# EAGLE board esp12_led (EAGLE 7.2.0)
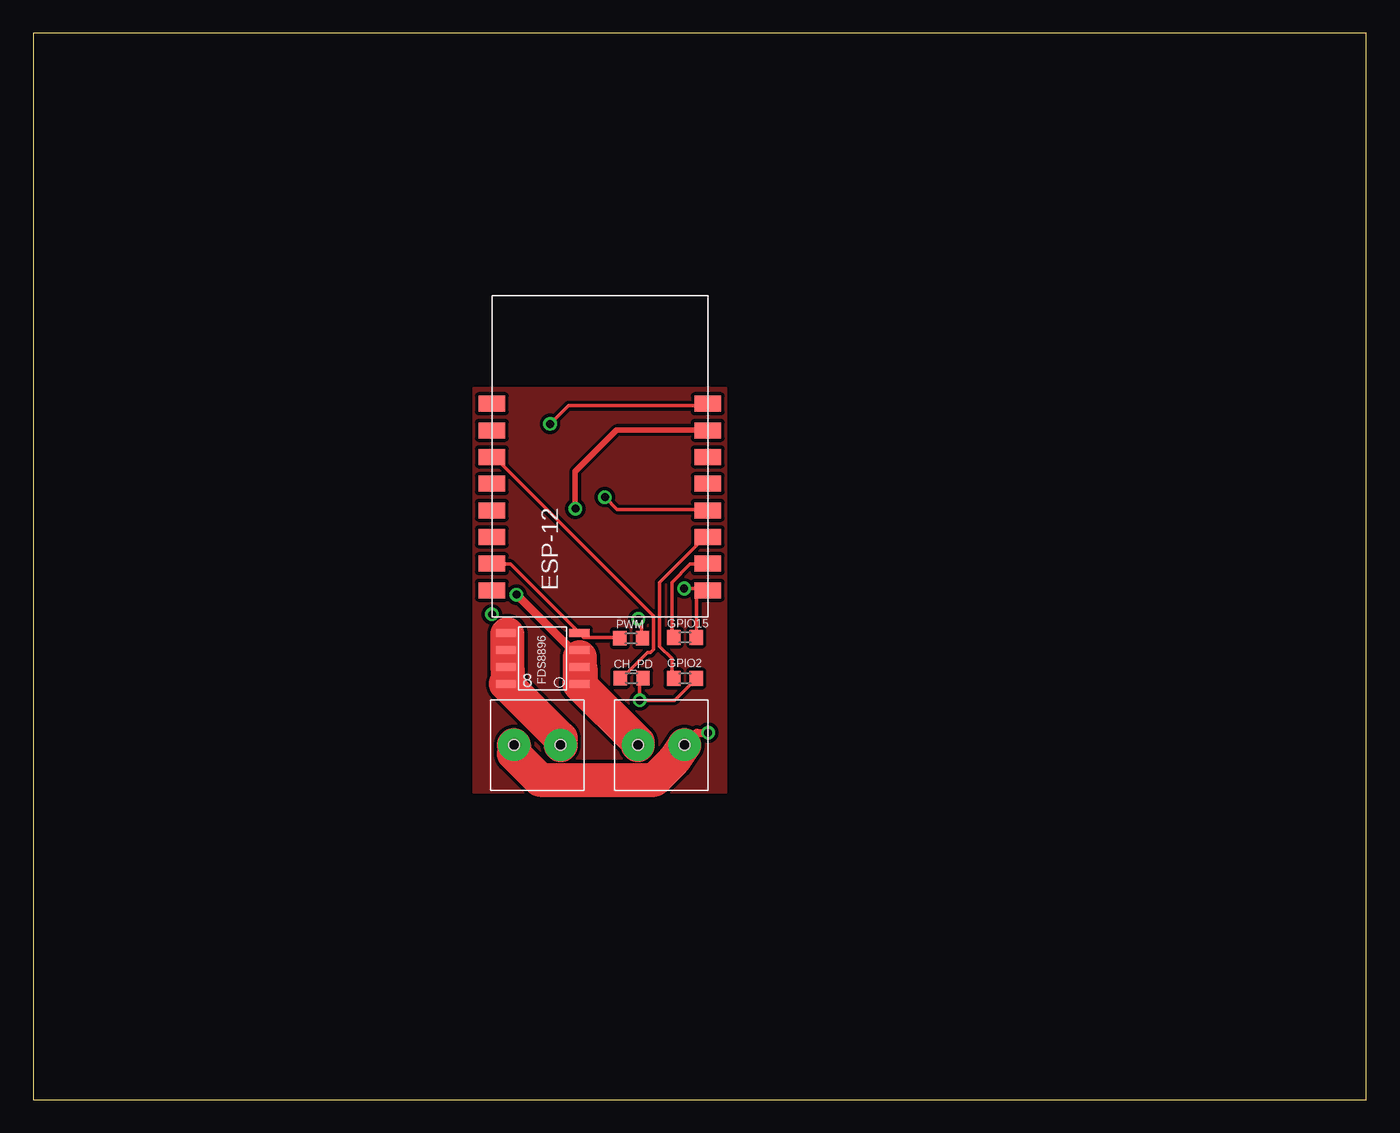
[diagram p0: board, top side]
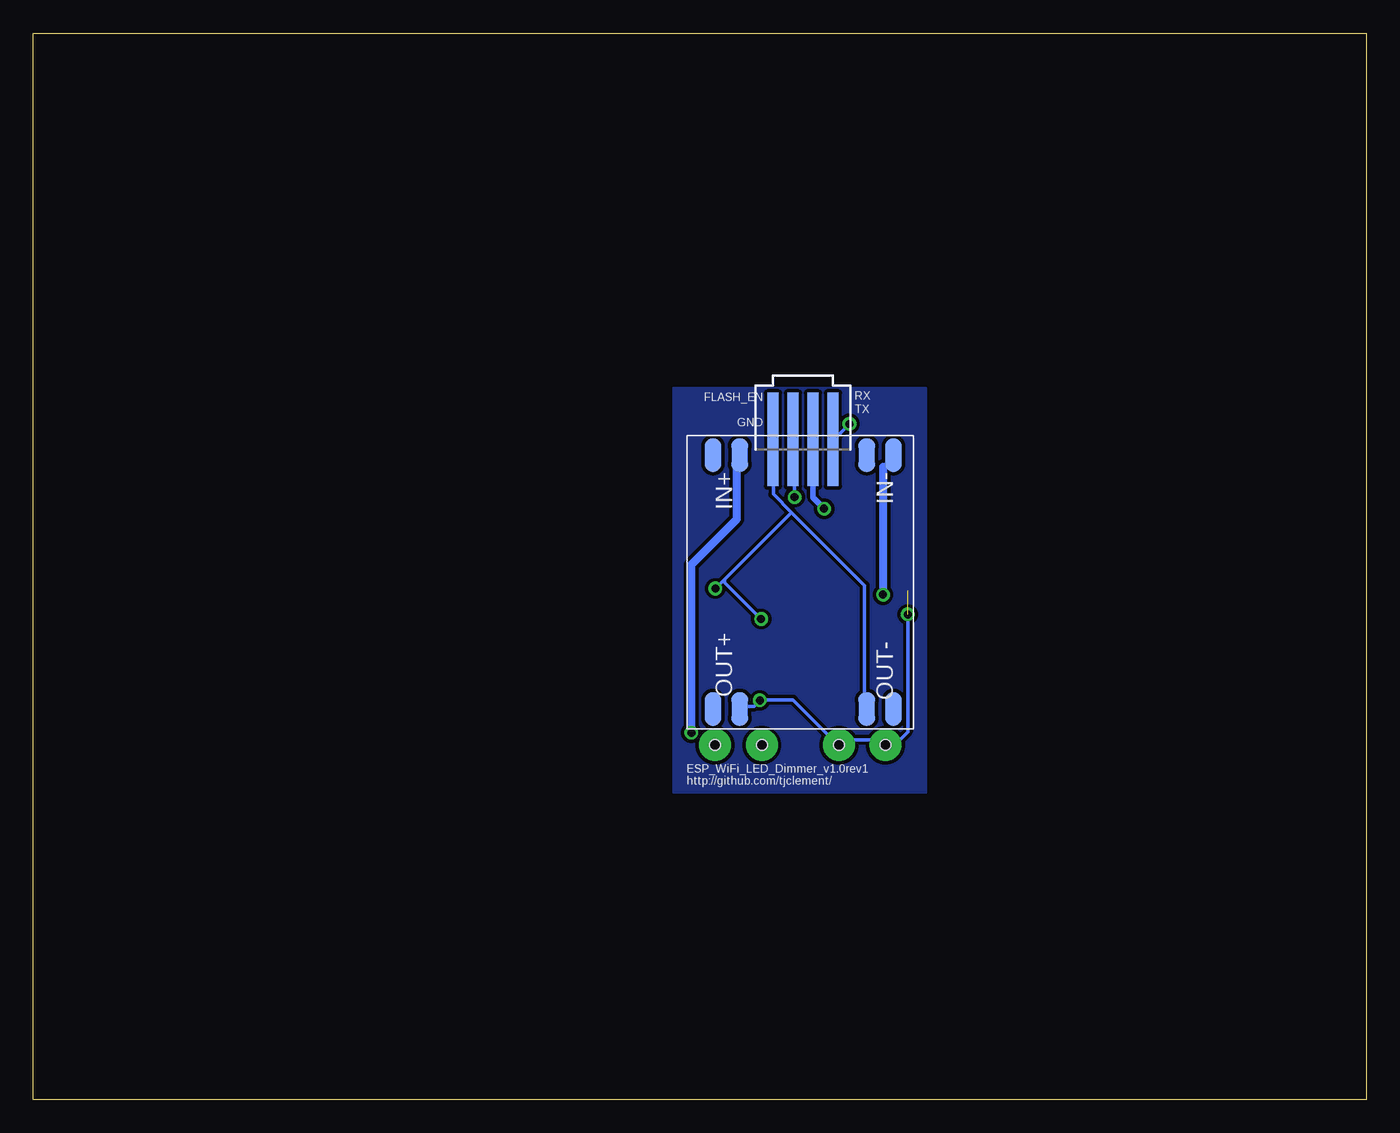
[diagram p1: board, bottom side, seen from below]

Size 100 x 80 mm. Coordinates in mm from the lower left corner, seen from the top.
Outline: 0,0 100,0 100,80 0,80 0,0
Copper layers (1*16): Top 0.035mm / dielectric 1.5mm / Bottom 0.035mm
Design rules "default": minimum track width 10mil, minimum drill 24mil, track to track 8mil, track to pad 8mil, pad to pad 8mil, via to via 8mil, smd to smd 8mil, copper to edge 40mil, drill to drill 8mil, minimum pad ring 10mil, minimum via ring 8mil, stop-mask expansion 4mil, vias tented up to drill 0mil, thermal gap 10mil

## Footprints (pad centres in the part's own frame; a part is rotated, then mirrored left to right if it is on the bottom)
KF350-2P = drill 0.8 pad 2.4: 1 -1.75,0; 2 1.75,0 | hole 0.8: -1.75,0; 1.75,0
R0603 = smd 1 x 1.1: 1 -0.85,0; 2 0.85,0
CN1594 = smd 2.54 x 1.27: IN+(1) -9.525,-4.547; IN+(2) -9.525,-6.553; IN-(1) -9.525,6.985; IN-(2) -9.525,4.978; OUT+(1) 9.525,-4.547; OUT+(2) 9.525,-6.553; OUT-(1) 9.525,6.985; OUT-(2) 9.525,4.978
ESP8266-ESP12 = smd 2 x 1.2: 1 16.2,2; 2 16.2,4; 3 16.2,6; 4 16.2,8; 5 16.2,10; 6 16.2,12; 7 16.2,14; 8 16.2,16; 9 0,16; 10 0,14; 11 0,12; 12 0,10; 13 0,8; 14 0,6; 15 0,4; 16 0,2
SO-8 = smd 1.524 x 0.61: 1 -2.743,1.905; 2 -2.743,0.635; 3 -2.743,-0.635; 4 -2.743,-1.905; 5 2.743,-1.905; 6 2.743,-0.635; 7 2.743,0.635; 8 2.743,1.905
87438-04 = smd 7 x 0.85: 1 0,2.25; 2 0,0.75; 3 0,-0.75; 4 0,-2.25

## Placement (x,y rotation side)
12V_IN  KF350-P2  [KF350-2P]  47.1,26.59 0 top
CH_PD  10k  [R0603]  44.89,31.62 0 top
DC_CONVERTER  CN1594THROUGH-HOLE  [CN1594]  42.45,38.83 270 bottom
ESP-12  ESP8266_ESP-12  [ESP8266-ESP12]  34.4,36.21 0 top
FDS8896  [SO-8]  38.21,33.1 180 top
GPIO2  10k  [R0603]  48.89,31.59 0 top
GPIO15  10k  [R0603]  48.89,34.67 0 top
LED  KF350-P2  [KF350-2P]  37.81,26.59 0 top
PROG  [87438-04]  42.26,49.53 270 bottom  (not fitted)
PWM  10k  [R0603]  44.85,34.61 0 top

## Library data of the parts
12V_IN LED = KF350-P2
CH_PD GPIO2 GPIO15 PWM = rcl
DC_CONVERTER = CN1594_smd
ESP-12 = ESP8266-ESP12
FDS8896 = transistor-fet
PROG = con-molex; OC_FARNELL: unknown; OC_NEWARK: unknown

## Nets
N$1: CH_PD.2 DC_CONVERTER.OUT+(1) ESP-12.16 GPIO2.2
N$2: CH_PD.1 ESP-12.11
N$3: ESP-12.3 GPIO2.1
N$4: FDS8896.5 FDS8896.6 FDS8896.7 FDS8896.8 LED.2
N$5: ESP-12.8 PROG.1
N$6: DC_CONVERTER.OUT-(2) ESP-12.1 GPIO15.2 PROG.4 PWM.2
N$7: ESP-12.2 GPIO15.1
N$8: ESP-12.7 PROG.2
N$9: ESP-12.4 PROG.3
N$10: DC_CONVERTER.IN-(1) FDS8896.3
N$12: 12V_IN.2 DC_CONVERTER.IN+(1) LED.1
S$2: ESP-12.15 FDS8896.4 PWM.1
S$3: 12V_IN.1 FDS8896.1 FDS8896.2

## Tracks (layer width: path | path; a pad name or v marks a point on that pad's centre or on a via)
N$1  (via drill 0.6, 0.61)  (1 unrouted)
  Top 0.254: CH_PD.2 45.72,31.55 45.49,31.32 v45.49,29.95 48.09,29.95 GPIO2.2
  Bottom 0.254: DC_CONVERTER.OUT+(1) 46.86,29.49 45.95,29.49 v45.49,29.95 45.44,30 43,30 40,27 35,27 34.4,27.6 v34.4,36.4
N$2
  Top 0.254: CH_PD.1 44.26,31.71 46.08,33.54 46.31,33.54 46.54,33.77 46.54,36.29 34.42,48.4 ESP-12.11
N$3
  Top 0.254: GPIO2.1 47.91,31.71 47.91,33.09 47,34 47,38.8 50.43,42.23 ESP-12.3
N$4
  Top 0.254: 35.57,31.26 FDS8896.8 | 35.57,32.4 FDS8896.7 35.57,32.63 | 35.57,33.54 FDS8896.6 35.57,33.77 | 35.57,34.91 FDS8896.5
  Top 2.54: 35.57,32.4 35.57,31.26 | 35.57,32.63 35.57,33.54 | 35.57,33.77 35.57,34.91 | LED.2 39.56,27.1 FDS8896.8
N$5  (via drill 0.61)
  Top 0.254: v38.77,50.69 40.14,52.06 50.43,52.06 ESP-12.8
  Bottom 0.254: v38.77,50.69 39.91,49.55 PROG.1
N$6  (via drill 0.61)
  Top 0.254: v48.83,38.34 49.74,38.34 | 49.74,38.34 50.43,38.34 ESP-12.1 49.74,38.34 | 49.74,38.34 49.74,34.69 GPIO15.2 | v45.4,36.06 45.63,35.83 45.63,34.69 PWM.2
  Bottom 0.254: 43.11,44.06 44.48,45.43 44.48,49.32 PROG.4 | 43.11,44.06 37.63,38.57 37.63,29.43 DC_CONVERTER.OUT-(2) | 43.11,44.06 48.14,39.03 | 48.14,39.03 v48.83,38.34 | v45.4,36.06 48.14,38.8 48.14,39.03
N$7
  Top 0.254: GPIO15.1 47.91,34.69 47.91,38.8 49.28,40.17 50.43,40.17 ESP-12.2
N$8  (via drill 0.61)
  Top 0.254: 50.43,50.23 ESP-12.7
  Top 0.406: 50.43,50.23 43.77,50.23 40.65,47.11 40.65,44.35 v40.67,44.33
  Bottom 0.254: 41.51,52.52 41.51,49.55 PROG.2
  Bottom 0.406: v40.67,44.33 41.51,45.17 PROG.2
N$9  (via drill 0.61)
  Top 0.254: v42.88,45.2 43.8,44.29 50.43,44.29 ESP-12.4
  Bottom 0.254: v42.88,45.2 42.88,49.32 PROG.3
N$10  (via drill 0.61)
  Top 0.254: 41.05,33.54 FDS8896.3 40.83,33.77 40.37,33.77
  Top 0.61: v36.25,37.89 40.37,33.77
  Bottom 0.254: 36.25,47.49 35.57,48.17 DC_CONVERTER.IN-(1)
  Bottom 0.61: 36.25,47.49 v36.25,37.89
N$12  (via drill 0.61)
  Top 0.61: 12V_IN.2 49.77,27.51 v50.63,27.51
  Top 2.54: LED.1 36.06,25.94 38,24 46.6,24 48.1,25.5 12V_IN.2
  Bottom 0.254: 47.23,48.17 DC_CONVERTER.IN+(1)
  Bottom 0.61: 47.23,48.17 47.23,43.53 50.65,40.11 50.65,27.74 v50.63,27.51
S$1
  pour Top (isolate 0.254): 33,53.43 52,53.43 52,23 33,23
  pour Bottom (isolate 0.254): 33,53.43 52,53.43 52,23 33,23
S$2
  Top 0.254: PWM.1 43.8,34.69 41.28,34.69 41.05,34.91 FDS8896.4 40.83,35.14 35.8,40.17 34.42,40.17 ESP-12.15
S$3
  Top 0.254: 41.05,32.63 FDS8896.2 41.05,32.4 | 41.05,31.26 FDS8896.1
  Top 2.54: 41.05,32.4 41.05,31.26 41,31.26 41,33.2 | 12V_IN.1 45.35,26.8 FDS8896.1

## Text on the board
bNames: RX | TX | FLASH_EN | GND | ESP_WiFi_LED_Dimmer_v1.0rev1 / http://github.com/tjclement/